# Altium PCB PCB2.PcbDoc
Units mm, origin at the board's own origin, x right, y up, seen from the top; angles counter-clockwise.
Board outline 152.4 x 101.6 mm, 2 copper layers (Top Layer, Bottom Layer); 6 components, 0 nets, 33 pads, 0 vias.
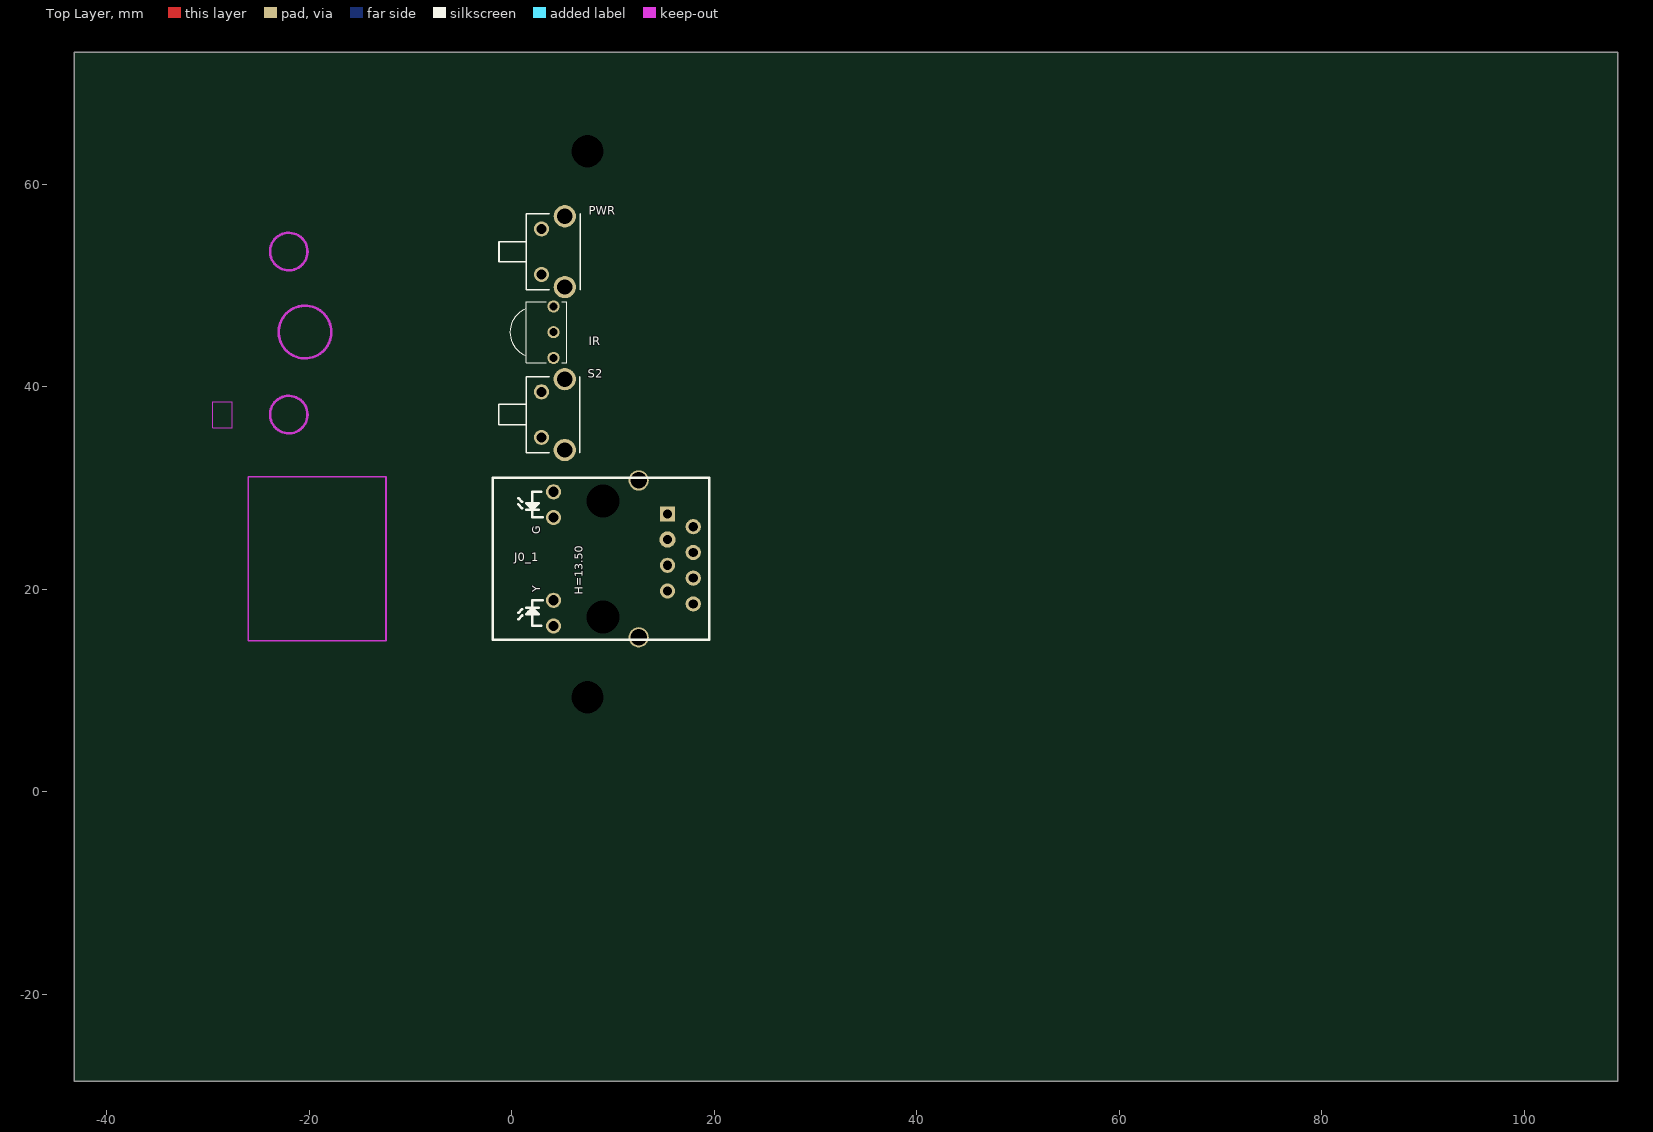
[diagram p0: Top Layer view]
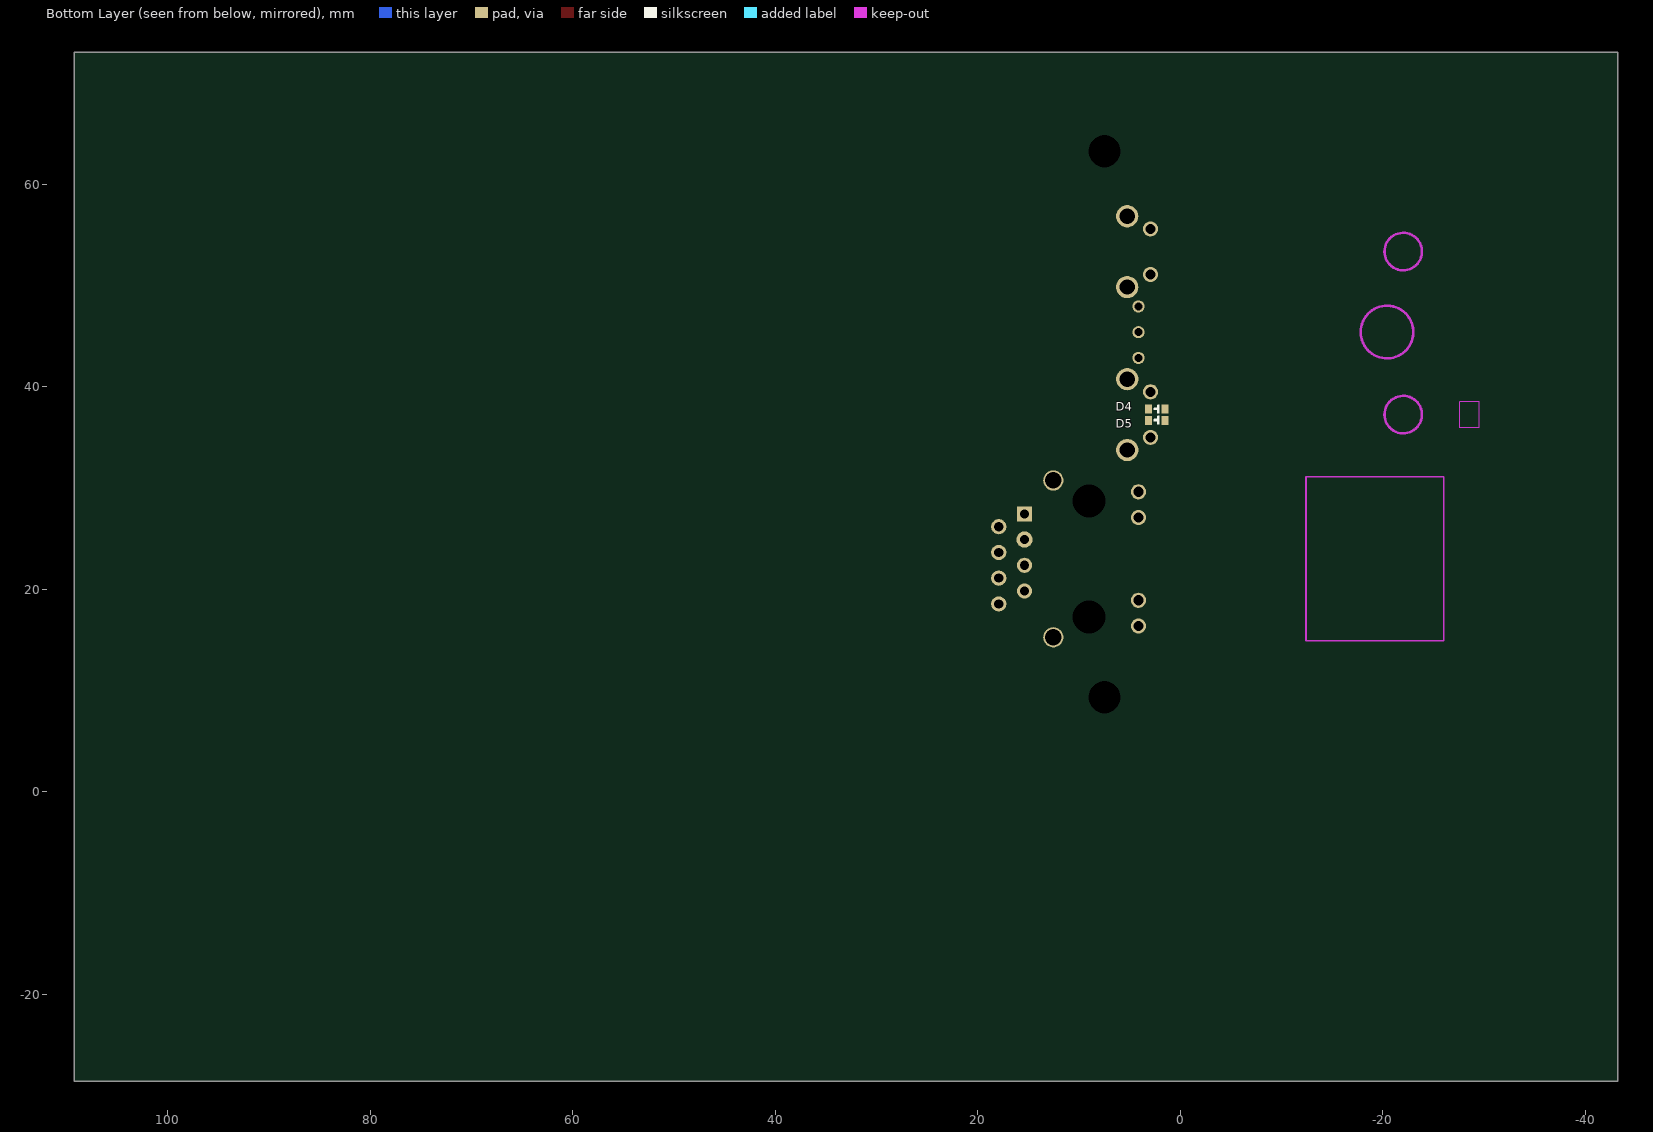
[diagram p1: Bottom Layer view, seen from below]

## Layer stack, top to bottom
Top Solder: solder mask 0.0102, Solder Resist, Dk 3.5
Top Layer: signal copper 0.0356
Dielectric 1: dielectric 0.32, FR-4, Dk 4.8
Bottom Layer: signal copper 0.0356
Bottom Solder: solder mask 0.0102, Solder Resist, Dk 3.5

## Board outline
-43.18,-28.575 109.22,-28.575 109.22,73.025 -43.18,73.025

## Design rules (kind name [scope] priority, off if disabled: settings)
Clearance [All] p1: gap=0.254 ignorepadtopadclearanceinfootprint=FALSE except(0: Arc-Hole Track-Hole SMDPad-Hole THPad-Hole Via-Hole Fill-Hole Poly-Hole Region-Hole Text-Hole)
PolygonConnect [All] p1: connectstyle=Relief reliefconductorwidth=0.254 reliefentries=4 polygonreliefangle="90 Angle" airgapwidth=0.254
RoutingVias [All] p1: holewidth=0.711 width=1.27 viastyle="Through Hole" minholewidth=0.711 minwidth=1.27 maxholewidth=0.711 maxwidth=1.27
SolderMaskExpansion [All] p1: expansion=0.102
Width [All] p1: maxlimit=0.254 minlimit=0.254 preferedwidth=0.254
30 further rules are at their usual default settings.

## Components (designator, comment, footprint, x,y, rotation, side; value= is the part's Value field where it differs from the comment)
D4 "LED_0603, GREEN" LED_0603_GREEN 2.337,37.795 r0 bottom
D5 "LED_0603, RED" LED_0603_RED 2.337,36.678 r0 bottom
IR "IRM-36xx" IRM-36XX 4.14,45.39 r270 top
J0_1 "HR911105A" RJ45-8P8C 9.044,23 r90 top (schematic designator J0)
PWR "BTN" SW-SIDE 5.258,53.34 r270 top
S2 "BTN" SW-SIDE 5.25,37.25 r270 top

## Footprints (in the part's own frame and the unit in brackets; to place one, negate y for a bottom-side part, rotate by r counter-clockwise, add the part's x,y. Pads: shape width x height; smd on the part's side, far side on the other; paste and mask are expansions set on the pad)
IRM-36XX [mm]
  round 1.2 hole 0.8: 1(-2.54,0) 2(0,0) 3(2.54,0)
  silkscreen extent -3,-4.3 3,1.3, body extent -3,-4.3 3,1.3, height 6.95
LED_0603_GREEN [mil]
  rect 28x36 smd: 1(-32,0) 2(32,0)
  silkscreen extent -10,-16 10,16, body extent -32,-16 32,16, height 24
LED_0603_RED [mil]
  rect 28x36 smd: 1(-32,0) 2(32,0)
  silkscreen extent -10,-16 10,16, body extent -32,-16 32,16, height 24
RJ45-8P8C [mm]
  rect 1.5x1.5 hole 0.9: 1(4.45,-6.35)
  round 1.5 hole 0.9: 2(3.18,-8.89) 4(0.64,-8.89) 5(-0.63,-6.35) 6(-1.9,-8.89) 7(-3.17,-6.35) 8(-4.44,-8.89)
  round 1.6 hole 0.9: 3(1.91,-6.35)
  round 1.5 hole 1.02: 9(6.625,4.9) 10(4.085,4.9) 11(-4.085,4.9) 12(-6.625,4.9)
  round 2 hole 1.63: 13(7.745,-3.5) 14(-7.745,-3.5)
  round 2.95 hole 3.25 unplated: MH1(5.715,0) MH2(-5.715,0)
  silkscreen extent -8,-10.48 8,10.92
SW-SIDE [mm]
  round 2.2 hole 1.5: 0(-3.5,0) 0(3.5,0)
  round 1.5 hole 1: 1(-2.25,-2.3) 2(2.25,-2.3)
  silkscreen extent -3.75,-6.5 3.75,1.5, body extent -3.75,-12.8 3.75,1.5, height 7.2

## Part data
D4 D5: library part LED_0603, "LED"
J0_1: library part RJ45INTLED
PWR S2: library part SW-PB, "Switch", LatestRevisionDate=17-Jul-2002, LatestRevisionNote="Re-released for DXP Platform.", PackageReference=SPST-2, Published=24-Mar-1999, Publisher="Altium Limited"

## Free pads (board coordinates)
  round 2.88 hole 3.18 unplated: MH1(7.5,9.35) MH2(7.5,63.25)

## Nets (pads, with @x,y where several pads share a name; then routed paths per layer and width w, separated by ;. In a path a pad name is that pad's centre, name@x,y a point inside that pad or via, vN(x,y) a via of type N, cw(c..) or ccw(c..) an arc to the next point about the centre after c; other vN are vias at no path point)
pads on no net: D4.1 D4.2 D5.1 D5.2 IR.1 IR.2 IR.3 J0_1.1 J0_1.2 J0_1.3 J0_1.4 J0_1.5 J0_1.6 J0_1.7 J0_1.8 J0_1.9 J0_1.10 J0_1.11 J0_1.12 J0_1.13 J0_1.14 J0_1.MH1 J0_1.MH2 PWR.0 PWR.1 PWR.2 S2.0 S2.1 S2.2

## Keep-outs
Keep-Out Layer:
  circle w0.254: c-22,37.25 r1.85
  circle w0.254: c-22,53.35 r1.85
  circle w0.254: c-20.4,45.4 r2.6
  lines w0.1: -29.5,35.936 -29.5,38.536 -27.6,38.536 -27.6,35.936 -29.5,35.936
  lines w0.152: -26,14.9 -12.4,14.9 -12.4,31.1 -26,31.1 -26,14.9

## Silkscreen, mask and mechanical layers (free items; w line width, h text height)
Mechanical 1:
  circle w0.1: c0,0 r0.7
  lines w0.1: -1,-1 1,1 ; -1,1 1,-1 ; 21.25,68.9 0,68.9 0,31.95 0,4.5 15,4.5 15,12.75 33.35,12.75 33.35,4.5 41.35,4.5 41.35,10.925 cw(c43.175,10.925) 45,10.925 45,0.5 45.5,0 55.7,0 56.2,0.5 56.2,7.45 cw(c57.15,7.45) 58.1,7.45 58.1,0.5 58.6,0 64.8,0 65.3,0.5 65.3,12.75 83.65,12.75 ; -29.5,35.936 -29.5,35.936
  lines w0.152: -40.5,14.9 0.5,14.9 ; -37,31.1 1.5,31.1 ; -36.9,35.4 -7.5,35.4 ; -36.1,42.8 0.3,42.8 ; -35.6,51.5 -7.5,51.5 ; -35.5,48 0.3,48 ; -35,55.2 -7.5,55.2 ; -33.7,39.1 -7.5,39.1 ; -29.3,35.936 2,35.936 ; -29.3,38.536 2,38.536 ; -27.6,0 -27.6,70.485 ; -26,0 -26,70.485 ; -12.4,14.6 -12.4,33
  text "PCB OUTLINE" at 10.4,3 h0.76
  text "PCB UP BORDER" at -24.6,2.2 h0.76 r90
Mechanical 4:
  text "从PCB底面 / 至挡板底面" at -39.1,66.5 h3.05
  text "M3" at 9.7,61.4 h0.76
  text ": 1.6mm +- 10%" at -28.5,5.1 h1.52 r90
  text "板厚" at -27.8,0.8 h3.05 r90

## Dimensions
-29.5,38.536 to -27.6,38.536 on Mechanical 4
-29.5,38.536 to -29.5,35.936 on Mechanical 4
-29.5,35.936 to -26,31.1 on Mechanical 4
0,0 to 15,4.5 on Mechanical 4
0,0 to 7.5,9.35 on Mechanical 4
7.5,9.35 to 7.5,63.25 on Mechanical 4
7.5,63.25 to 21.25,68.9 on Mechanical 4
-26,14.9 to -26,31.1 on Mechanical 4
-26,14.9 to 0,0 on Mechanical 4
-23.85,37.25 to -26,31.1 on Mechanical 4
-23,45.4 to -23.85,37.25 on Mechanical 4
-23,45.4 to -23.85,53.35 on Mechanical 4
-20.4,45.4 to -20.4,45.4 on Mechanical 4
-22,53.35 to -22,53.35 on Mechanical 4
-22,37.25 to -22,37.25 on Mechanical 4
-26,0 to -12.4,14.9 on Mechanical 4
-22,35.4 to -26,0 on Mechanical 4
-26,70.485 to -22,55.2 on Mechanical 4
-26,70.485 to -20.4,48 on Mechanical 4
0,4.5 to 7.5,9.35 on Mechanical 4
7.5,63.25 to 0,68.9 on Mechanical 4
0,0 to 15,4.5 on Mechanical 4
15,4.5 to 33.35,4.5 on Mechanical 4
33.35,4.5 to 41.35,4.5 on Mechanical 4
41.35,10.925 to 45,10.925 on Mechanical 4
45,0.5 to 56.2,0.5 on Mechanical 4
56.2,7.45 to 58.1,7.45 on Mechanical 4
58.1,0.5 to 65.3,0.5 on Mechanical 4

## Text inside footprints (layer, text, board x,y; h text height)
J0_1: Top Overlay "G" at 2.821,25.413 h0.8 r90; Top Overlay "Y" at 2.821,19.698 h0.8 r90; Top Overlay "H=13.50" at 7.012,19.444 h0.8 r90